# Altium PCB KLogShield.PcbDoc
Units mil, origin at the board's own origin, x right, y up, seen from the top; angles counter-clockwise.
Board outline 2100 x 2700 mil, 2 copper layers (Top Layer, Bottom Layer); 36 components, 38 nets, 184 pads, 32 vias.
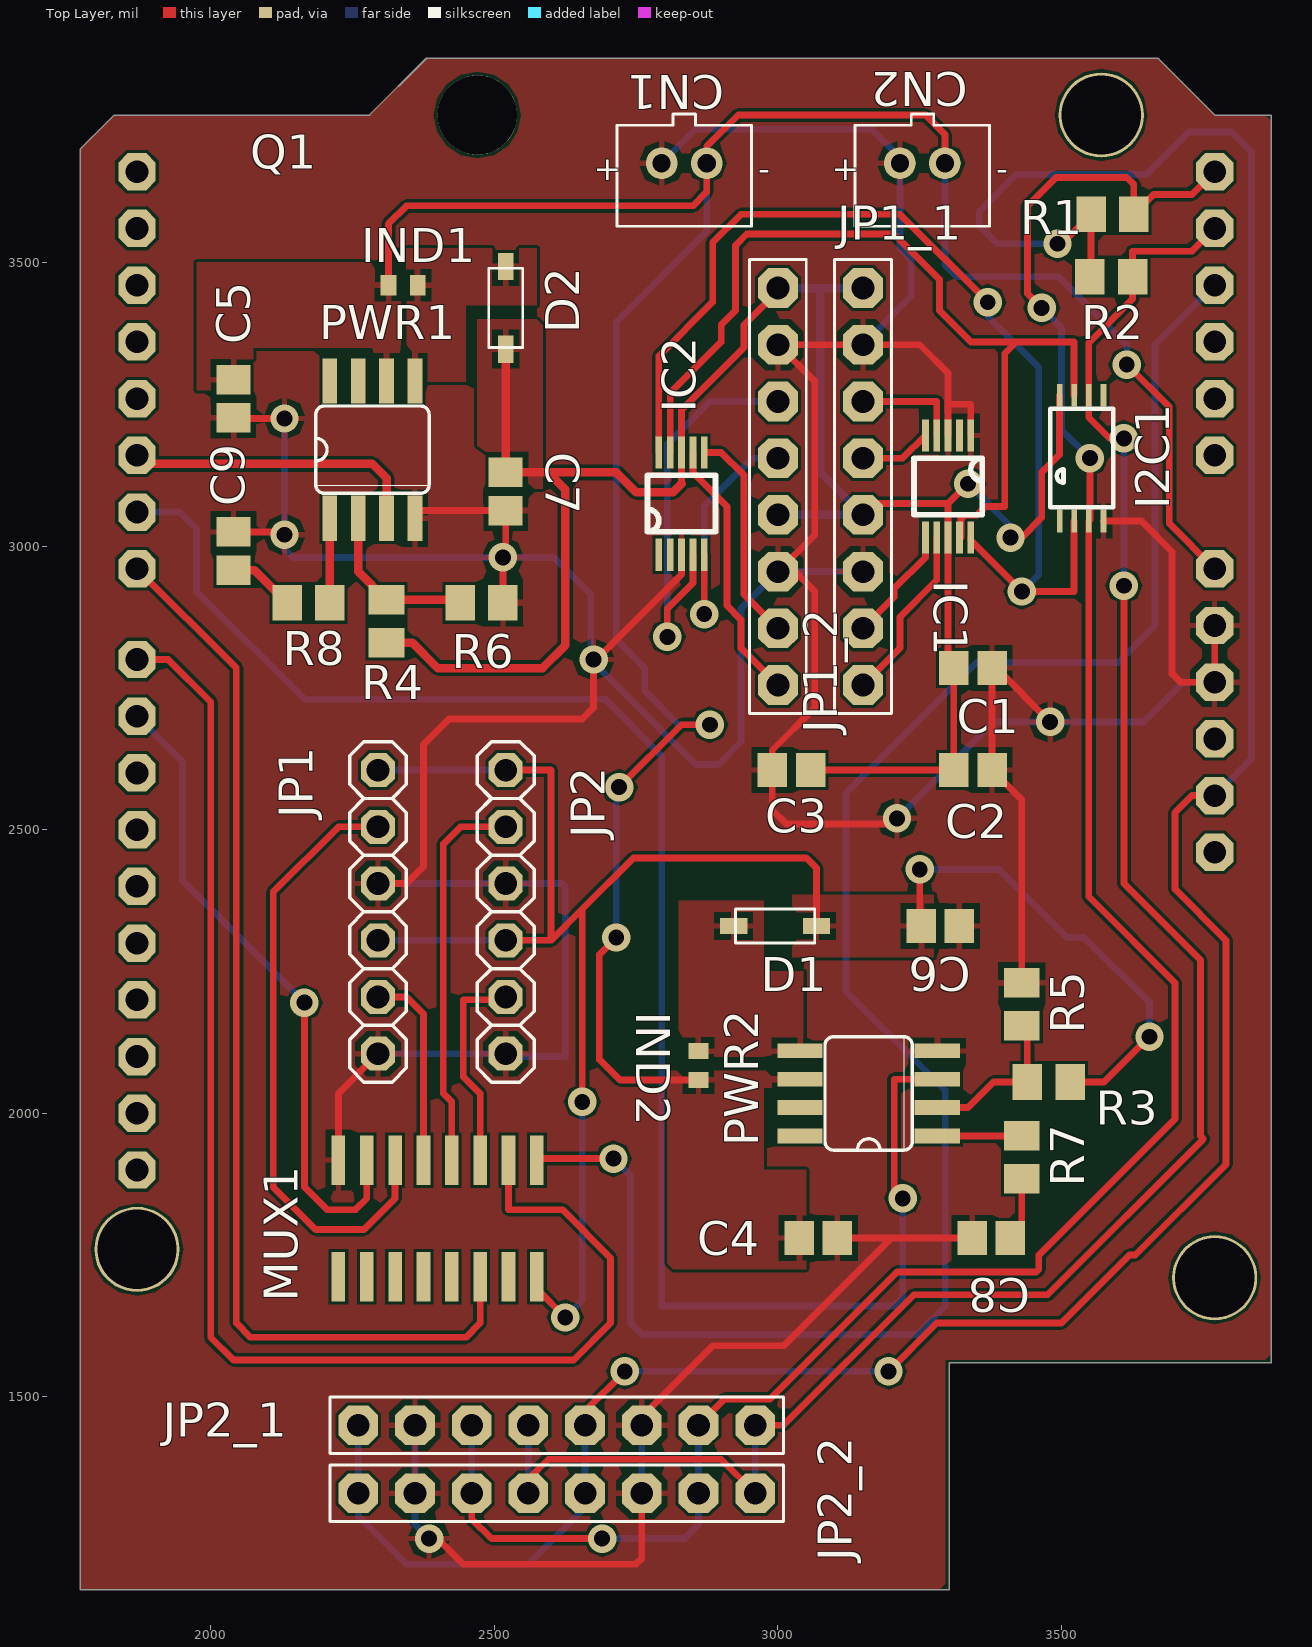
[diagram p0: Top Layer view]
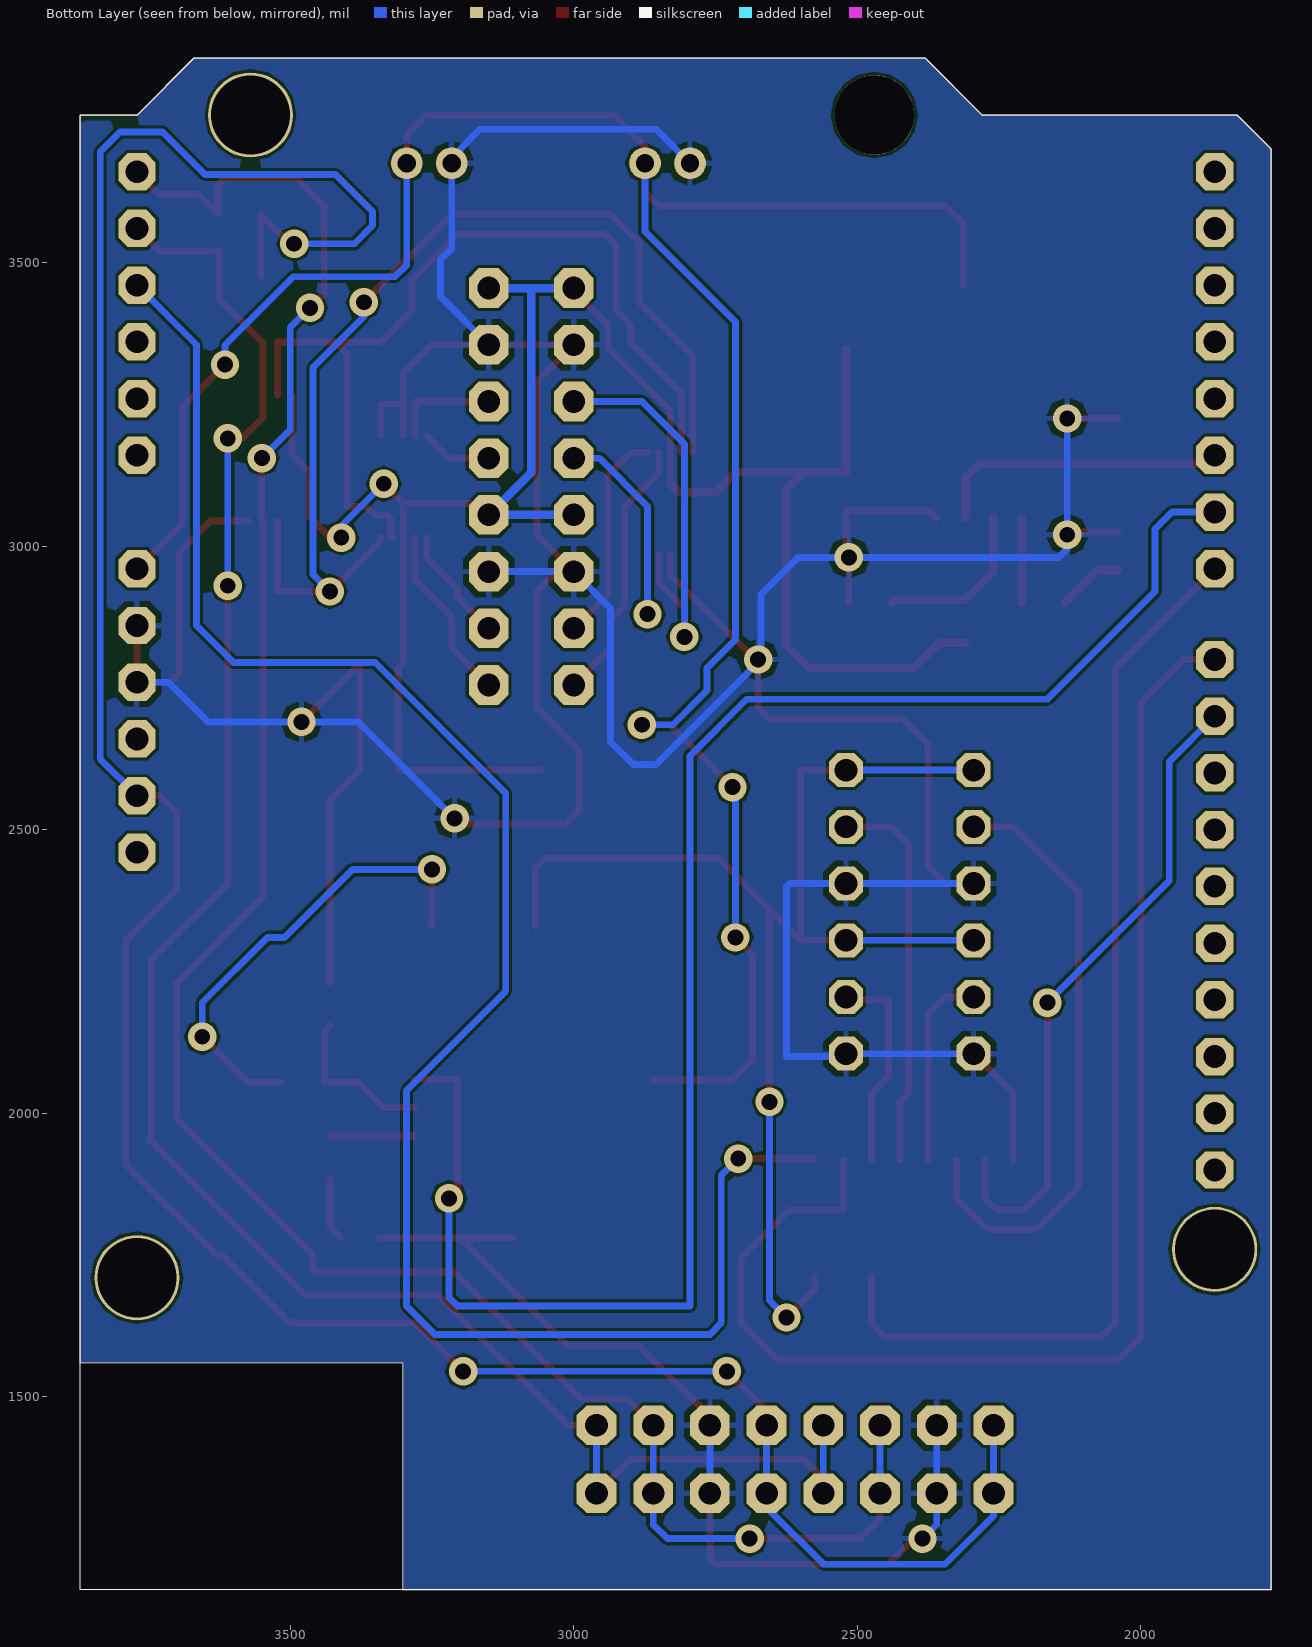
[diagram p1: Bottom Layer view, seen from below]

## Layer stack, top to bottom
Top Solder: solder mask 0.4, Solder Resist, Dk 3.5
Top Layer: signal copper 1.4
Dielectric 1: dielectric 12.6, FR-4, Dk 4.8
Bottom Layer: signal copper 1.4
Bottom Solder: solder mask 0.4, Solder Resist, Dk 3.5

## Board outline
1770,3700 1830,3760 2280,3760 2380,3860 3670,3860 3770,3760 3870,3760 3870,1560 3301.63,1560 3301.63,1160 1770,1160 1770,3700

## Design rules (kind name [scope] priority, off if disabled: settings)
Clearance [All] p1: gap=5
PolygonConnect [All] p1: connectstyle=Relief reliefconductorwidth=10 reliefentries=4 polygonreliefangle="90 Angle" airgapwidth=10
RoutingVias [All] p1: holewidth=28 width=50 viastyle="Through Hole" minholewidth=28 minwidth=50 maxholewidth=28 maxwidth=50
SolderMaskExpansion [All] p1: expansion=4
UnpouredPolygon [All] p1: allowunpoured=FALSE
Width PWR [(InNet('3V3') OR InNet('5V') OR InNet('5V1') OR InNet('5V2') OR InNet('BAT+') OR InNet('GND'))] p1: maxlimit=32 minlimit=10 preferedwidth=27
Width [All] p2: maxlimit=15 minlimit=12 preferedwidth=12
29 further rules are at their usual default settings.

## Classes and differential pairs
net class pressure: 5V 5V1 ADC1_0 ADC1_1 ADC1_2 ADC1_3 ADC2_0 ADC2_1 ADC2_2 ADC2_3 GND NetIC1_2 NetIC2_2 SCL SDA
net class temperature: 3V3 GND SCL3V3 SDA3V3
net class Undefined: 5V2 A3 D7 D8 D9 GND MOS1_1 MOS1_2 MOS1_3 MOS1_4 NetMUX1_9 NetMUX1_10 NetMUX1_11 NetMUX1_12 NetMUX1_13 NetMUX1_15

## Components (designator, comment, footprint, x,y, rotation, side; value= is the part's Value field where it differs from the comment)
C1 "0.1uF" C0805 3343.46,2785 r0 top
C2 "0.1uF" C0805 3343.46,2605 r0 top
C3 "0.1uF" C0805 3023.46,2605 r0 top
C4 "47uF" C0805 3071,1780 r0 top
C5 "47uF" C0805 2040,3260 r270 top
C6 "220uF" C0805 3286,2330 r0 top
C7 "220uF" C0805 2520,3096.54 r270 top
C8 "100pF" C0805 3376.54,1780 r180 top
C9 "100pF" C0805 2040,2991 r90 top
CN1 "BAT_IN" JST-PH-2-THM 2835,3675 r180 top locked
CN2 "CTL_IN" JST-PH-2-THM 3255,3675 r180 top locked
D1 "Schottky" SOD-123 2995,2330 r180 top
D2 "Schottky" SOD-123 2520,3420 r90 top
I2C1 "LTC4301" TSSOP-8 3535,3155 r0 top
IC1 "ADS1115" 10-VSSOP 3240,3195 r270 top
IC2 "ADS1115" 10-VSSOP 2890,2985 r90 top
IND1 "Ind" R1005 2339,3460 r0 top
IND2 "Ind" R1005 2860,2084 r90 top
JP1 "MOS1" 1X06 2295,2355 r270 top
JP1_1 "<b>PIN HEADER</b>" 1X08-BIG 3150,3105 r270 top
JP1_2 "<b>PIN HEADER</b>" 1X08-BIG 3000,3105 r270 top
JP2 "MOS2" 1X06 2520,2355 r270 top
JP2_1 "<b>PIN HEADER</b>" 1X08-BIG 2610,1450 r0 top
JP2_2 "<b>PIN HEADER</b>" 1X08-BIG 2610,1330 r0 top
MUX1 "74x153" SO16 2400,1815 r180 top
PWR1 "LTC1308AB" SO08 2285,3170 r0 top
PWR2 "LTC1308AB" SO08 3160,2035 r90 top
Q1 "ARDUINOR3-NOIOREF-NOTEXT" ARDUINOR3-NOTEXT-NOIOREF 3870,1160 r90 top locked
R1 "4.7K" M0805 3590,3585 r180 top
R2 "4.7K" M0805 3588,3475 r180 top
R3 "309K" M0805 3477,2055 r0 top
R4 "309K" M0805 2310,2867.6 r270 top
R5 "100K" M0805 3430,2192.6 r270 top
R6 "100K" M0805 2477.6,2900 r180 top
R7 "47K" M0805 3430,1922 r90 top
R8 "47K" M0805 2172,2900 r0 top

## Footprints (in the part's own frame and the unit in brackets; to place one, negate y for a bottom-side part, rotate by r counter-clockwise, add the part's x,y. Pads: shape width x height; smd on the part's side, far side on the other; paste and mask are expansions set on the pad)
1X06 [mil]
  oct 60x60 hole 40: 1(-250,0) 2(-150,0) 3(-50,0) 4(50,0) 5(150,0) 6(250,0)
  silkscreen extent -300,-50 300,50
1X08-BIG [mil]
  oct 70x70 hole 40: 1(-350,0) 2(-250,0) 3(-150,0) 4(-50,0) 5(50,0) 6(150,0) 7(250,0) 8(350,0)
  silkscreen extent -400,-50 400,50
10-VSSOP [mil]
  rect 57x12 smd mask+0: 1(0,100) 2(0,80) 3(0,60) 4(0,40) 5(0,20) 6(180,20) 7(180,40) 8(180,60) 9(180,80) 10(180,100)
  silkscreen extent 40,0 140,120
ARDUINOR3-NOTEXT-NOIOREF [mil]
  oct 66x66 hole 40: 3V(1400,100) 5V(1500,100) A0(2000,100) A1(2100,100) A2(2200,100) A3(2300,100) A4(2400,100) A5(2500,100) AREF(940,2000) D0(2500,2000) D1(2400,2000) D2(2300,2000) D3(2200,2000) D4(2100,2000) D5(2000,2000) D6(1900,2000) D7(1800,2000) D8(1640,2000) D9(1540,2000) D10(1440,2000) D11(1340,2000) D12(1240,2000) D13(1140,2000) GND(1040,2000) GND1(1700,100) GND2(1600,100) RESET(1300,100) SCL(740,2000) SDA(840,2000) VIN(1800,100)
C0805 [mil]
  rect 52x60 smd: 1(-33.46,0) 2(34,0)
JST-PH-2-THM [mil]
  round 56 hole 32: 1(40,0) 2(-39.37,0)
  silkscreen extent -118,-87 119,111
M0805 [mil]
  rect 52x63 smd: 1(-37.4,0) 2(38,0)
R1005 [mil]
  rect 28x36 smd: 1(-25.59,0) 2(26,0)
SO08 [mil]
  rect 26x80 smd: 1(-75,-121) 2(-25,-121) 3(25,-121) 4(75,-121) 5(75,121) 6(25,121) 7(-25,121) 8(-75,121)
  silkscreen extent -100,-77 100,77
SO16 [mil]
  rect 24x87 smd: 1(-175,-102.36) 2(-125,-102.36) 3(-75,-102.36) 4(-25,-102.36) 5(25,-102.36) 6(75,-102.36) 7(125,-102.36) 8(175,-102.36) 9(175,103) 10(125,103) 11(75,103) 12(25,103) 13(-25,103) 14(-75,103) 15(-125,103) 16(-175,103)
SOD-123 [mil]
  rect 48x28 smd: A(73,0) C(-72.83,0)
  silkscreen extent -70,-30 70,30
TSSOP-8 [mil]
  rect 10x40 smd: 1(-38.39,-110.75) 2(-12.8,-110.75) 3(13,-110.75) 4(39,-110.75) 5(39,111) 6(13,111) 7(-12.8,111) 8(-38.39,111)
  silkscreen extent -55,-87 56,87

## Part data
C1 C2 C3 C4 C5 C6 C7 C8 C9: library part C-USC0805
CN1 CN2: library part JST_2PIN-THM
D1 D2: library part DIODESOD-123
JP1 JP2: library part PINHD-1X6
JP1_1 JP1_2 JP2_1 JP2_2: library part PINHD-1X8BIG
R1 R2 R3 R4 R5 R6 R7 R8: library part R-US_M0805

## Free pads (board coordinates)
  round 150 hole 140: 18(1870,1760) 20(3570,3760) 21(3770,1710)
  round 140 hole 140: 19(2470,3760)

## Via types
v1: diameter 50, hole 28, Top Layer to Bottom Layer, 32 vias

## Nets (pads, with @x,y where several pads share a name; then routed paths per layer and width w, separated by ;. In a path a pad name is that pad's centre, name@x,y a point inside that pad or via, vN(x,y) a via of type N, cw(c..) or ccw(c..) an arc to the next point about the centre after c; other vN are vias at no path point)
3V3: JP2_1.1 JP2_1.5 JP2_2.1 JP2_2.5 Q1.3V R1.2 R2.2 | length 4959.8
  Top Layer w12: JP2_1.5 2660,1475 v1(2730,1545) ; v1(3195,1545) 3280,1630 3500,1630 3620,1750 3630,1750 3790,1910 3790,2305 3700,2395 3700,2530 3730,2560 Q1.3V Q1.3V@3765,2565 ; v1(3493,3533) 3500,3533 R1.2 3552,3477 R2.2
  Bottom Layer w12: JP2_1.1 JP2_2.1 2260,1290 2345,1205 2560,1205 2660,1305 JP2_2.5 JP2_1.5 ; v1(2730,1545) 2730,1535 2740,1545 v1(3195,1545) ; v1(3493,3533) 3387,3533 3355,3565 3355,3590 3420,3655 3650,3655 3725,3730 3800,3730 3835,3695 3835,2625 Q1.3V
5V: IC2.1
5V1: C1.1 C2.1 C3.2 C7.1 D2.C I2C1.8 IC1.8 IC2.8 JP1_1.1 JP1_1.5 JP1_2.1 JP1_2.5 R4.2 | length 3720.9
  Top Layer w12: 2830,3110 IC2.8 2830,3240 2940,3350 2940,3390 3000,3450 JP1_2.1 ; C3.2 C2.1 C1.1 3300,2795 IC1.8 3300,3075 ; JP1_1.5 3170,3075 3300,3075 ; v1(3335,3110) 3300,3075 ; v1(3410,3015) 3430,3015 3465,3050 3465,3130 3496.61,3161.61 I2C1.8
  Top Layer w15: R4.2 2355.4,2829.6 2400,2785 2585,2785 2625,2825 2625,3100 2595,3130 ; D2.C C7.1 2595,3130 ; 2830,3110 2815,3095 2750,3095 2715,3130 2595,3130
  Bottom Layer w12: v1(3335,3110) 3410,3035 v1(3410,3015)
  Bottom Layer w15: JP1_2.5 JP1_1.5 3075,3130 3075,3455 ; JP1_2.1 3075,3455 ; JP1_1.1 3075,3455
5V2: C6.1 D1.C JP1.1 JP1.4 JP2.1 JP2.4 MUX1.16 R3.2 | length 3209.1
  Top Layer w12: JP2.4 2600,2305 ; JP2.1 2600,2605 2600,2305 ; MUX1.16 2575,1690 v1(2625,1640) ; v1(2655,2020) 2655,2360 ; D1.C 3067.83,2432.17 3050,2450 2745,2450 2655,2360 ; v1(3250,2430) 3250,2332.54 C6.1 ; R3.2 3575,2055 v1(3655,2135) ; 2600,2305 2655,2360
  Bottom Layer w12: JP1.4 JP2.4 ; JP1.1 JP2.1 ; v1(2625,1640) 2655,1670 v1(2655,2020) ; v1(3250,2430) 3390,2430 3510,2310 3540,2310 3655,2195 v1(3655,2135)
A3: MUX1.1 Q1.A3 | length 3310.7
  Top Layer w12: MUX1.1 2577.64,1920 v1(2710,1920)
  Bottom Layer w12: v1(2710,1920) 2740,1890 2740,1630 2760,1610 3205,1610 3245,1610 3295,1660 3295,2040 3120,2215 3120,2565 3350,2795 3600,2795 3665,2860 3665,3355 Q1.A3
ADC1_0: IC1.4 JP1_1.3 | length 190
  Top Layer w12: JP1_1.3 3280,3255 IC1.4
ADC1_1: IC1.5 JP1_1.4 | length 126.6
  Top Layer w12: JP1_1.4 3220,3155 IC1.5
ADC1_2: IC1.6 JP1_1.7 | length 205.6
  Top Layer w12: JP1_1.7 3205,2910 3205,2925 3260,2980 IC1.6
ADC1_3: IC1.7 JP1_1.8 | length 313.8
  Top Layer w12: JP1_1.8 3215,2820 3215,2875 3280,2940 IC1.7
ADC2_0: IC2.4 JP1_2.3 | length 729.7
  Top Layer w12: v1(2805,2840) 2805,2890 2850,2935 IC2.4
  Bottom Layer w12: v1(2805,2840) 2805,3180 2880,3255 JP1_2.3
ADC2_1: IC2.5 JP1_2.4 | length 460.2
  Top Layer w12: v1(2870,2880) IC2.5
  Bottom Layer w12: v1(2870,2880) 2870,3070 2955,3155 JP1_2.4
ADC2_2: IC2.6 JP1_2.7 | length 381.4
  Top Layer w12: IC2.6 2900,3165 2940,3125 2940,2915 JP1_2.7
ADC2_3: IC2.7 JP1_2.8 | length 472.1
  Top Layer w12: IC2.7 2850,3130 2910,3070 2910,2895 2935,2870 2935,2820 JP1_2.8
BAT+: C4.1 C5.1 CN1.2 CN2.2 IND1.1 IND2.1 PWR1.6 PWR2.6 Q1.VIN | length 4344.3
  Top Layer w12: IND1.1 2313.41,3568.41 2345,3600 2850,3600 2874.37,3624.37 CN1.2 2874.37,3704.37 2930,3760 3260,3760 3294.37,3725.63 CN2.2 ; v1(2715,2310) 2685,2280 2685,2095 2721.59,2058.41 IND2.1 ; v1(2720,2575) 2830,2685 v1(2880,2685) ; v1(3615,3320) 3690,3245 3690,3040 Q1.VIN
  Bottom Layer w12: v1(2715,2310) 2715,2570 v1(2720,2575) ; CN1.2 2874.37,3554.37 2715,3395 2715,2835 2765,2785 2765,2745 2825,2685 v1(2880,2685) ; CN2.2 3294.37,3495.63 3315,3475 3494.37,3475 3615,3354.37 v1(3615,3320)
D3: Q1.D3
D4: Q1.D4
D5: PWR1.3 Q1.D5 | length 527.6
  Top Layer w15: Q1.D5 1885,3145 2285,3145 2310,3120 PWR1.3
D6: PWR2.3 Q1.D6 | length 3036
  Top Layer w12: v1(3220,1850) 3205,1865 3205,2060 PWR2.3
  Bottom Layer w12: Q1.D6 1945,3060 1975,3030 1975,2920 2165,2730 2695,2730 2795,2630 2795,1660 3205,1660 3220,1675 v1(3220,1850)
D7: MUX1.14 Q1.D7 | length 1935.2
  Top Layer w12: Q1.D7 2045,2785 2045,1630 2070,1605 2450,1605 2475,1630 MUX1.14
D8: MUX1.2 Q1.D8 | length 2447.1
  Top Layer w12: Q1.D8 1925,2800 2000,2725 2000,1605 2040,1565 2640,1565 2705,1630 2705,1745 2620,1830 2525,1830 MUX1.2
D9: MUX1.7 Q1.D9 | length 1154.4
  Top Layer w12: v1(2165,2195) 2165,1870 2205,1830 2255,1830 2275,1850 MUX1.7
  Bottom Layer w12: Q1.D9 1950,2620 1950,2410 v1(2165,2195)
GND: C1.2 C2.2 C3.1 C4.2 C5.2 C6.2 C7.2 C8.2 C9.2 CN1.1 CN2.1 I2C1.4 IC1.1 IC1.3 IC2.3 JP1.3 JP1.6 JP1_1.2 JP1_1.6 JP1_2.2 JP1_2.6 JP2.3 JP2.6 JP2_1.2 JP2_1.6 JP2_2.2 JP2_2.6 MUX1.8 PWR1.4 PWR2.4 Q1.GND1 Q1.GND2 R5.1 R6.1 | length 10713.3
  Top Layer w12: C9.2 2125,3025 v1(2130,3020) ; C5.2 2041,3225 v1(2130,3225) ; MUX1.8 2225,2035 JP1.6 ; JP1.3 2345,2405 2375,2435 2375,2650 2420,2695 2655,2695 2675,2715 v1(2675,2800) 2680,2800 2830,2950 IC2.3 ; JP2_2.2@2360,1310 JP2_2.2 ; PWR1.4 2373.54,3062.54 C7.2 2520,2985 v1(2515,2980) R6.1 ; v1(2385,1250) 2400,1250 2445,1205 2750,1205 2760,1215 JP2_2.6 ; JP2_1.6 2760,1465 2885,1590 3010,1590 3200,1780 C8.2 C4.2 ; v1(3210,2520) 3200,2510 3015,2510 2990,2535 C3.1 2990,2640 3065,2715 3065,2920 3030,2955 JP1_2.6 3065,3020 3065,3290 JP1_2.2 JP1_1.2 3250,3355 3300,3305 3300,3250 ; IC1.3 3300,3250 ; IC1.1 3340,3250 3300,3250 ; R5.1 3430,2552.46 C2.2 C1.2 3385,2785 v1(3480,2690) ; I2C1.4 3640.75,3044.25 3695,2990 3695,2775 3710,2760 Q1.GND2 Q1.GND1
  Bottom Layer w12: v1(2130,3225) v1(2130,3020) 2130,2995 2145,2980 v1(2515,2980) 2605,2980 2670,2915 2670,2805 v1(2675,2800) 2675,2795 2855,2615 2895,2615 2935,2655 2935,2890 JP1_2.6 JP1_1.6 ; JP1.6 JP2.6 2525,2100 2625,2100 2625,2400 2620,2405 JP2.3 JP1.3 ; JP2_1.2 JP2_2.2 2360,1275 v1(2385,1250) ; JP2_2.6 JP2_1.6 ; CN1.1 2855,3735 3165,3735 3215,3685 CN2.1 3215,3525 3235,3505 3235,3440 JP1_1.2 ; v1(3210,2520) 3380,2690 v1(3480,2690) 3645,2690 3715,2760 Q1.GND2
MOS1_1: JP1.2 MUX1.6 | length 1088.8
  Top Layer w12: JP1.2 2225,2505 2110,2390 2110,1870 2185,1795 2270,1795 2325,1850 MUX1.6
MOS1_2: JP1.5 MUX1.5 | length 350.1
  Top Layer w12: JP1.5 2345,2205 2375,2175 MUX1.5
MOS1_3: JP2.2 MUX1.4 | length 686.3
  Top Layer w12: MUX1.4 2425,2020 2410,2035 2410,2475 2440,2505 JP2.2
MOS1_4: JP2.5 MUX1.3 | length 372.1
  Top Layer w12: MUX1.3 2475,2035 2445,2065 2445,2200 2515,2200 JP2.5
NetC8_1: C8.1 R7.1 | length 112.9
  Top Layer w12: C8.1 3430,1800 R7.1
NetC9_1: C9.1 R8.1 | length 118.4
  Top Layer w15: C9.1 2077.06,2957.54 R8.1
NetD1_A: D1.A IND2.2 PWR2.5
NetD2_A: D2.A IND1.2 PWR1.5
NetPWR1_1: PWR1.1 R8.2 | length 149
  Top Layer w15: R8.2 PWR1.1
NetPWR1_2: PWR1.2 R4.1 R6.2 | length 296.4
  Top Layer w15: PWR1.2 2260,2955 R4.1 2434.6,2905 R6.2
NetPWR2_1: PWR2.1 R7.2 | length 149
  Top Layer w12: PWR2.1 R7.2
NetPWR2_2: PWR2.2 R3.1 R5.2 | length 280.8
  Top Layer w12: PWR2.2 3335,2010 3380,2055 R3.1 3439.6,2145 R5.2
SCL: I2C1.2 IC1.10 IC2.10 | length 1887.7
  Top Layer w12: IC2.10 2790,3335 2885,3430 2885,3535 2935,3585 3215,3585 v1(3370,3430) ; IC1.10 3340,3010 v1(3430,2920) 3522.2,2920 I2C1.2
  Bottom Layer w12: v1(3370,3430) 3370,3405 3460,3315 3460,2950 v1(3430,2920)
SCL3V3: I2C1.3 JP2_1.3 JP2_1.7 JP2_2.3 JP2_2.7 Q1.A5 R1.1 | length 4002
  Top Layer w12: JP2_2.3 2460,1285 2495,1250 v1(2690,1250) ; JP2_1.7 2906,1496 2986,1496 3210,1720 3455,1720 3460,1725 3460,1750 3700,1990 3700,2230 3548,2382 I2C1.3 3550,3046.25 v1(3550,3155) ; v1(3465,3420) 3440,3445 3440,3600 3490,3650 3615,3650 3627.4,3637.6 R1.1 3662.4,3620 3730,3620 Q1.A5
  Bottom Layer w12: JP2_2.3 JP2_1.3 ; v1(2690,1250) 2835,1250 2860,1275 JP2_2.7 JP2_1.7 ; v1(3465,3420) 3500,3385 3500,3205 v1(3550,3155)
SDA: I2C1.7 IC1.9 IC2.9 | length 1643.5
  Top Layer w12: IC2.9 2810,3270 2900,3360 2900,3390 2925,3415 2925,3530 2945,3550 3205,3550 3285,3470 3285,3415 3340,3360 3420,3360 ; IC1.9 3323,3015 3323,3048.06 3329.44,3054.5 3350.56,3054.5 3366.06,3070 3400,3070 3400,3340 3420,3360 ; I2C1.7 3522.2,3360 3420,3360
SDA3V3: I2C1.6 JP2_1.4 JP2_1.8 JP2_2.4 JP2_2.8 Q1.A4 R2.1 | length 3560.1
  Top Layer w12: JP2_2.4 2560,1355 2595,1390 2900,1390 JP2_2.8 ; JP2_1.8 3010,1450 3240,1680 3475,1680 3750,1955 3745,1960 3745,2270 3610,2405 v1(3610,2930) ; v1(3610,3190) 3585,3190 3548,3227 I2C1.6 3548,3358 3625.4,3435.4 3625.4,3520 3730,3520 Q1.A4
  Bottom Layer w12: JP2_2.4 JP2_1.4 ; JP2_2.8 JP2_1.8 ; v1(3610,2930) v1(3610,3190)
pads on no net: I2C1.1 I2C1.5 IC1.2 IC2.2 MUX1.9 MUX1.10 MUX1.11 MUX1.12 MUX1.13 MUX1.15 PWR1.7 PWR1.8 PWR2.7 PWR2.8 Q1.5V Q1.A0 Q1.A1 Q1.A2 Q1.AREF Q1.D0 Q1.D1 Q1.D2 Q1.D10 Q1.D11 Q1.D12 Q1.D13 Q1.GND Q1.RESET Q1.SCL Q1.SDA

## Polygon pours and split planes (outlines as drawn)
BAT+ on Top Layer "PWR1_VIN" (solid, remove dead copper, pour order 2): 1975,3275 1975,3500 2335,3500 2335,3275 2285,3275 2285,3350 2075,3350 2075,3275 1975,3275
NetD2_A on Top Layer "PWR1_VIN" (solid, remove dead copper, pour order 4): 2345,3290 2345,3525 2575,3525 2575,3425 2450,3425 2450,3290 2345,3290
GND on Top Layer "PWR1_VIN" (solid, remove dead copper, pour order 6): 1975,3250 2125,3250 2150,3225 2450,3225 2450,3075 2575,3075 2575,2850 2500,2850 2500,3000 2450,3000 2450,3050 2445,3055 2425,3055 2425,3170 1975,3170
5V1 on Top Layer "PWR1_VIN" (solid, remove dead copper, pour order 8): 2470,3400 2470,3100 2585,3100 2585,3400
BAT+ on Top Layer "PWR1_VIN" (solid, remove dead copper, pour order 10): 3050,1725 3050,1900 2975,1900 2975,2045 3050,2045 3050,2070 3045,2075 2805,2075 2805,1725
NetD1_A on Top Layer "PWR1_VIN" (solid, remove dead copper, pour order 12): 3045,2095 3045,2250 2975,2250 2975,2375 2825,2375 2825,2100 2975,2100 2975,2095 3045,2095
5V2 on Top Layer "PWR1_VIN" (solid, remove dead copper, pour order 14): 3025,2385 3025,2275 3275,2275 3275,2385
GND on Top Layer "PWR1_VIN" (solid, remove dead copper, pour order 16): 3090,1725 3090,1900 3125,1900 3125,2225 3300,2225 3300,2385 3485,2385 3485,2200 3345.11,2200 3340,2200 3340,2150 3340,2090 3342.61,2090 3165,2090 3165,1725
GND on Top Layer "GND_PLANE" (solid, remove dead copper, pour order 18): 1829.97,3760 2277.47,3760 2363.61,3842.06 2380,3860 2405,3860 3670,3860 3770,3760 3870,3760 3870,1565 3295,1565 3295,1160 1770,1160 1770,3700 1781.66,3712.86
GND on Bottom Layer "GND_PLANE" (solid, remove dead copper, pour order 20): 1770,3700 1830,3760 2280,3760 2380,3860 3670,3860 3775,3755 3775,3750 3860,3750 3870,3760 3870,1560 3301.63,1560 3301.63,1160 1770,1160 1770,3700

## Text inside footprints (layer, text, board x,y; h text height)
CN1: Top Overlay "+" at 2675,3645 h42.5; Top Overlay "-" at 2965,3645 h42.5
CN2: Top Overlay "+" at 3095,3645 h42.5; Top Overlay "-" at 3385,3645 h42.5